# Altium PCB CT310高端控制盒基板电路V1.1.PcbDoc (part 3 of 3)
Units mil, origin at the board's own origin, x right, y up, seen from the top; angles counter-clockwise.
Board outline 8162.61 x 6196.81 mil, 2 copper layers (Top Layer, Bottom Layer), stack 65.792 mil thick; 275 components, 181 nets, 950 pads, 286 vias.
Unrouted connection lines stored in the file: 29.
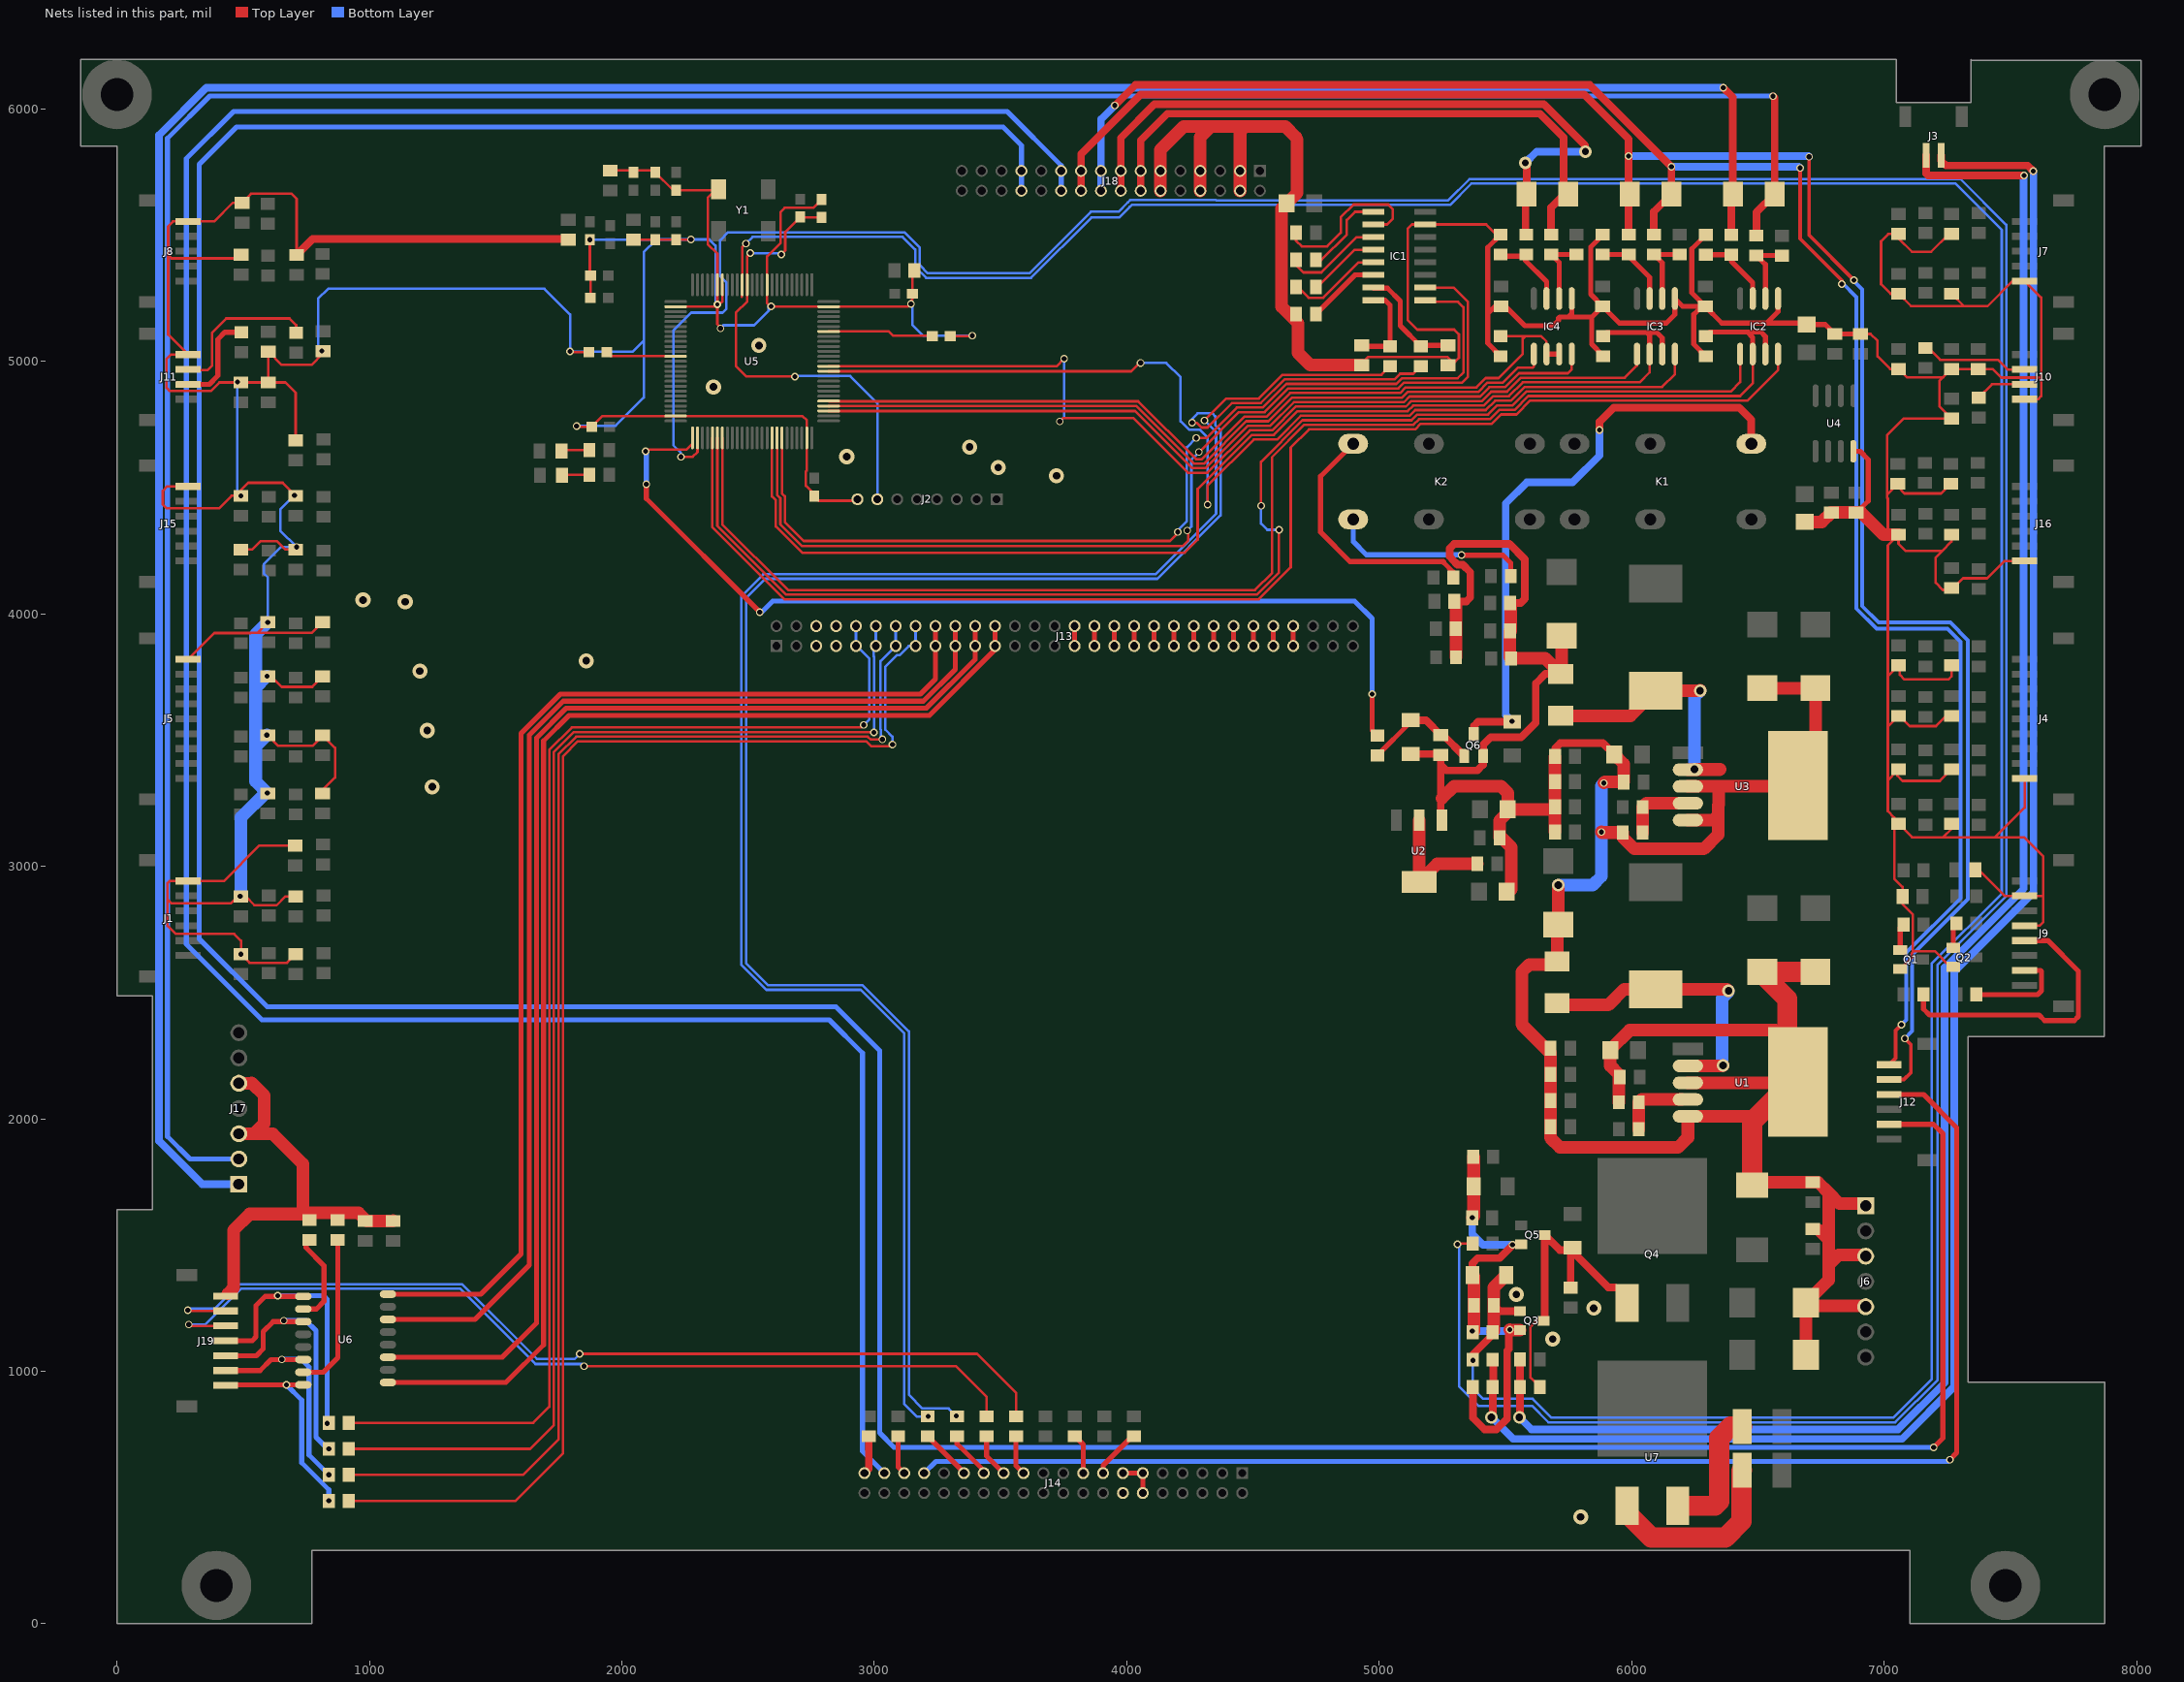
[diagram p3: the nets of this part, all layers, seen from the top]

## Via types
v1: diameter 30, hole 20, Top Layer to Bottom Layer, tented both sides, 230 vias
v2: diameter 50, hole 30, Top Layer to Bottom Layer, tented both sides, 22 vias
v3: diameter 60, hole 30, Top Layer to Bottom Layer, tented both sides, 16 vias
v4: diameter 80, hole 50, Top Layer to Bottom Layer, tented both sides, 12 vias
v5: diameter 50, hole 28, Top Layer to Bottom Layer, tented both sides, 4 vias
v6: diameter 24, hole 16, Top Layer to Bottom Layer, tented both sides, 1 vias
v7: diameter 30, hole 16, Top Layer to Bottom Layer, tented both sides, 1 vias

## Nets (pads, with @x,y where several pads share a name; then routed paths per layer and width w, separated by ;. In a path a pad name is that pad's centre, name@x,y a point inside that pad or via, vN(x,y) a via of type N, cw(c..) or ccw(c..) an arc to the next point about the centre after c; other vN are vias at no path point) (continued)
NetC87_2: C87.2 D9.2 Q6.1 R44.2 | length 464.5
  Top Layer w20: R44.2@4992.7,3439.63 5124.7,3571.63 D9.2@5124.7,3578.93
  Top Layer w30: D9.2@5124.7,3578.93 5185.15,3578.93 C87.2@5243.7,3520.37 5252.63,3520.37 Q6.1@5336.3,3436.69
NetC105_1: C105.1 IC1.3 | length 397
  Top Layer w10: C105.1@4670.28,5402.36 4670.28,5382.01 4700,5352.3 4770.49,5352.3 4910.49,5492.3 IC1.3@4976.64,5492.3
NetC105_2: C105.2 IC1.1 | length 317.6
  Top Layer w10: C105.2@4771.06,5402.36 4871.7,5503 4871.7,5560 4904,5592.3 IC1.1@4976.64,5592.3
NetC106_1: C106.1 IC1.5 | length 382
  Top Layer w10: C106.1@4670.28,5294.83 4677.49,5294.83 4720.02,5252.3 4778.03,5252.3 4918.03,5392.3 IC1.5@4976.64,5392.3
NetC106_2: C106.2 IC1.4 | length 283.2
  Top Layer w10: C106.2@4754.53,5294.83 4902,5442.3 IC1.4@4976.64,5442.3
NetC107_1: C107.1 IC1.6 | length 291.8
  Top Layer w20: C107.1@4749.02,5187.3 4904.02,5342.3 IC1.6@4976.64,5342.3
NetC108_2: C108.2 IC1.2 | length 662.1
  Top Layer w10: C108.2@4670.28,5509.89 4670.28,5478.01 4693,5455.3 4794,5455.3 4847.7,5509 4847.7,5571 4898,5621.3 5035.41,5621.3 5054,5602.7 5054,5565.3 5031,5542.3 IC1.2@4976.64,5542.3
NetC109_1: C109.1 IC1.8 R103.1 | length 351.1
  Top Layer w20: C109.1@4931,5063.6 4934.94,5059.67 R103.1@5043,5059.67 5043,5222.71 5023.41,5242.3 IC1.8@4976.64,5242.3
NetC111_1: C111.1 IC1.7 R102.1 | length 446.2
  Top Layer w20: IC1.7@4976.64,5292.3 4978.64,5290.3 5032.41,5290.3 5083,5239.7 5083,5141.66 R102.1@5165,5059.67 ; R102.1@5168.94,5063.6 C111.1@5273,5063.6
NetD3_1: D3.1 Q3.3 Q4.1 Q5.3 R12.2 R18.2 | length 1175.6
  Top Layer w10: R18.2@5636.37,937.3 5598.7,974.96 5598.7,1176 5622.5,1199.8 Q3.3@5650.25,1199.8
  Top Layer w30: Q3.3@5655.25,1204.8 Q5.3@5655.25,1539.8 5715.32,1479.73 D3.1@5758.11,1479.73 ; R12.2@5758.11,1331.73 D3.1@5758.11,1479.73 ; D3.1@5765,1489.37 5758.11,1482.48 D3.1@5758.11,1479.73 ; 5933.92,1332.73 5907.08,1332.73 5760.08,1479.73 D3.1@5758.11,1479.73
NetD7_2: D7.2 L2.2 U1.2 | length 1172.4
  Top Layer w50: D7.2@5704.77,2458.32 5712.09,2451 5907.7,2451 5969.4,2512.7 L2.2@6094.7,2512.7 6378.01,2512.7 v2(6383.7,2507) ; U1.2@6199.41,2209.63 U1.2@6222.6,2209.63 6359.08,2209.63 v2(6361.41,2211.96)
  Bottom Layer w50: v2@6358.54,2214.83 6358.54,2478.83 v2@6383.7,2504
NetD8_2: D8.2 L3.2 U3.2 | length 1112.9
  Top Layer w50: D8.2@5751.03,3596 5995.3,3596 L3.2@6094.7,3695.4 6267.11,3695.4 6269.7,3698 6270.7,3697 v2(6270.7,3695) ; U3.2@6222.6,3383.16 6348.86,3383.16 6349.7,3384 v2(6248.7,3384)
  Bottom Layer w50: v2(6248.7,3384) 6248.7,3673 v2(6270.7,3695)
NetD10_1: D10.1 K1.1 Q6.3 | length 2386.7
  Top Layer w30: Q6.3@5373.7,3523.31 5373.7,3555 5391.63,3572.93 D10.1@5525.7,3572.93 ; v1(5872.7,4728) 5872.7,4761 5928.7,4817 6425.7,4817 6473.7,4769 K1.1@6473.7,4674
  Bottom Layer w30: v1(5525.7,3575) 5500.7,3600 5500.7,4437 5584.7,4521 5765.7,4521 5872.7,4628 v1(5872.7,4728)
NetD60_2: D60.2 R100.2 | length 107.2
  Top Layer w10: D60.2@1764.31,4648.29 R100.2@1871.54,4648.29
NetD61_2: D61.2 R101.2 | length 107.3
  Top Layer w10: D61.2@1764.27,4550.69 R101.2@1871.54,4550.69
NetF1_2: F1.2 U7.1 | length 751.9
  Top Layer w80: U7.1@5982,467.35 5982,437.5 6077.7,341.8 6370.7,341.8 6434.54,405.63 6434.54,605.57 F1.2@6436.96,608
NetF2_2: F2.2 U7.3 | length 531.9
  Top Layer w80: U7.3@6182,467.35 6329.06,467.35 6346.54,484.83 6346.54,735.83 6391.71,781 F2.2@6436.96,781
NetIC2_6: IC2.6 R109.2 R117.2 | length 286.8
  Top Layer w20: IC2.6@6529.44,5249.05 6529.44,5383.94 R117.2@6493.73,5419.64 6593.74,5419.64 R109.2@6594.73,5418.65
NetIC2_7: IC2.7 R107.1 R116.2 | length 309.7
  Top Layer w20: R107.1@6293.73,5422.65 R116.2@6394.73,5422.64 6394.73,5397.02 6479.44,5312.31 IC2.7@6479.44,5249.05
NetIC3_6: IC3.6 R112.2 R119.2 | length 290.3
  Top Layer w20: IC3.6@6120.94,5249.05 6120.94,5390.44 R119.2@6087.74,5423.65 R112.2@6189.73,5423.64
NetIC3_7: IC3.7 R110.1 R118.2 | length 312.1
  Top Layer w20: R110.1@5884.73,5423.64 R118.2@5987.74,5423.65 5987.74,5416.46 6070.94,5333.25 IC3.7@6070.94,5249.05
NetIC4_6: IC4.6 R115.2 R121.2 | length 288.7
  Top Layer w20: IC4.6@5712.44,5249.05 5712.44,5391.94 R121.2@5680.74,5423.65 R115.2@5781.73,5423.64
NetIC4_7: IC4.7 R113.1 R120.2 | length 301.7
  Top Layer w20: R113.1@5480.73,5418.64 5482.73,5416.65 5579.74,5416.65 5579.74,5398.46 5662.44,5315.75 IC4.7@5662.44,5249.05
NetJ9_5: J9.5 R4.2 | length 1139.7
  Top Layer w20: R4.2@7155.37,2492.3 7155.37,2435.33 7179.7,2411 7613.7,2411 7635.7,2389 7752.7,2389 7769.11,2405.41 7769.11,2585.19 7648,2706.3 7647.47,2705.77 J9.5@7556.23,2705.77
NetJ9_7: J9.7 R5.2 | length 409.6
  Top Layer w20: R5.2@7365.37,2492.29 7608.37,2492.29 7623.44,2507.37 7623.44,2583.85 7619.64,2587.66 J9.7@7556.23,2587.66
NetJ10_2: J10.2 R6.2 | length 427.2
  Top Layer w10: R6.2@7163.98,5052.66 7175.04,5052.66 7221.09,5006.61 7450.09,5006.61 7488.49,4968.22 J10.2@7556.23,4968.22
NetJ10_3: J10.3 R8.2 | length 204
  Top Layer w10: R8.2@7374,4856.67 7426.5,4909.16 J10.3@7556.23,4909.16
NetJ11_2: J11.2 R7.2 | length 381.7
  Top Layer w20: J11.2@281.77,4909.16 365.87,4909.16 399.7,4943 399.7,5088 427.37,5115.67 R7.2@493,5115.67
NetJ11_3: J11.3 R29.2 | length 632
  Top Layer w10: J11.3@281.77,4968.22 284.99,4965 358.7,4965 376.7,4983 376.7,5114 432.7,5170 683.7,5170 709.65,5144.06 R29.2@709.65,5113.67
NetJ14_15: J14.15 R54.1 | length 200.3
  Top Layer w20: J14.15@3905.78,596.61 3905.78,627.07 4021.33,742.63 R54.1@4027.7,742.63
NetJ14_17: J14.17 R58.1 | length 159.6
  Top Layer w20: R58.1@3794.37,742.63 3827.04,709.96 J14.17@3827.04,596.61
NetJ14_23: J14.23 R38.1 | length 158.4
  Top Layer w20: R38.1@3561.04,742.63 3561.04,626.39 J14.23@3590.82,596.61
NetJ14_25: J14.25 R43.1 | length 174.1
  Top Layer w20: R43.1@3444.37,742.63 3444.37,664.32 J14.25@3512.08,596.61
NetJ14_27: J14.27 R52.1 | length 189.8
  Top Layer w20: R52.1@3327.7,742.63 3327.7,713 3433.34,607.37 J14.27@3433.34,596.61
NetJ14_29: J14.29 R57.1 | length 207.9
  Top Layer w20: R57.1@3211.04,742.63 J14.29@3347.7,605.96 ; J14.29@3347.7,603.5 J14.29@3347.7,605.96 ; J14.29@3354.6,596.61 3354.6,599.07 J14.29@3347.7,605.96
NetJ14_35: J14.35 R46.1 | length 156
  Top Layer w20: R46.1@3094.37,742.63 3094.37,620.61 J14.35@3118.38,596.61
NetJ14_39: J14.39 R51.1 | length 153
  Top Layer w30: J14.39@2960.9,596.61 2977.7,613.42 R51.1@2977.7,742.63
NetK2_4: K2.4 R21.1 | length 1017.4
  Top Layer w20: K2.4@4896.7,4674 4767.7,4545 4767.7,4323 4883.7,4207 5253,4207 5254.7,4205.3 5254.7,4203.59 5293.07,4165.22 R21.1@5293.07,4144
NetK2_5: K2.5 R22.1 | length 799.9
  Top Layer w20: v1(5325.7,4233) 5325.7,4232 5490.7,4232 5521.07,4201.63 R22.1@5521.07,4149
  Bottom Layer w20: K2.5@4896.7,4374 4896.7,4286.3 4949,4234 v1@5325.7,4234
NetL1_2: L1.2 U2.2 U2.4 | length 504.1
  Top Layer w50: U2.2@5158,3182.34 U2.4@5158,2938.25 5230.05,3010.3 L1.2@5388.13,3010.3
NetQ1_1: Q1.1 R122.1 | length 105.9
  Top Layer w20: Q1.1@7063.85,2668.7 7063.85,2756.52 R122.1@7076.63,2769.3
NetQ2_1: Q2.1 R123.1 | length 102.9
  Top Layer w20: Q2.1@7273.85,2676.7 7273.85,2761.52 R123.1@7286.63,2774.3
NetR1_1: R1.1 U6.10 | length 359.9
  Top Layer w20: U6.10@738.12,1246.5 790.2,1246.5 819.7,1276 819.7,1419 748.88,1489.83 R1.1@748.88,1512.78
NetR2_2: R2.2 R3.2 U1.4 | length 283.1
  Top Layer w50: R2.2@6027.5,1958.3 6027.5,2064.6 6039.2,2076.3 U1.4@6199.41,2076.3
NetR30_2: R30.2 R35.2 U3.4 | length 286.6
  Top Layer w50: R35.2@6043.07,3134.03 R30.2@6043.07,3235.01 6057.89,3249.83 U3.4@6222.6,3249.83
NetR37_1: R37.1 U6.15 | length 624.3
  Top Layer w20: U6.15@738.12,996.5 817.2,996.5 874.7,1054 R37.1@874.7,1517.88
NetR97_1: R97.1 U5.37 | length 279.2
  Top Layer w10: R97.1@1940.43,5036.29 1955.81,5020.91 2211.92,5020.91 U5.37@2212.85,5019.98
NetR98_2: R98.2 U5.94 | length 417.6
  Top Layer w10: U5.94@2819.15,5118.4 3057.46,5118.4 3074.57,5101.29 3228.27,5101.29 R98.2@3229.27,5100.29
NRST: C89.1 J2.7 R99.2 U5.14 | length 1863
  Top Layer w10: v1(2508.7,5429) 2496.31,5416.61 U5.14@2496.31,5303.44 2496.31,5237.61 2451.7,5193 2451.7,4981 2492.7,4940 v1(2684.7,4940) ; v1(2631.7,5424) 2646.7,5439 2646.7,5512.57 R99.2@2706,5571.86 2707.3,5570.57 C89.1@2790.71,5570.57
  Bottom Layer w10: v1(2508.7,5429) 2626.7,5429 v1(2631.7,5424) ; v1@2684.7,4942 2904.79,4942 3011.86,4834.94 J2.7@3011.86,4454
POWERCNT: R20.1 U5.52 | length 13953.6
  Top Layer w10: v1(2233.7,4622) 2280.7,4622 2299.46,4640.76 U5.52@2299.46,4697.15 ; v1@5309.7,1505.3 R20.1@5370.63,1505.3
  Bottom Layer w10: v1(2233.7,4622) 2233.7,4638 2203.7,4668 2203.7,5122 2274.7,5193 2398.7,5193 2413.7,5208 2413.7,5312.54 2388.7,5337.54 2388.7,5479 2420.7,5511 3119.25,5511 3179.7,5450.54 3179.7,5381.35 3212.05,5349 3613.65,5349 3857.65,5593 3967.34,5593 4004.17,5629.83 4004.35,5629.83 4013.51,5639 4352.97,5639 4354.18,5637.79 5272.79,5637.79 5357,5722 7302.11,5722 7483.7,5540.4 7483.7,2882.34 7211.7,2610.34 7211.7,966.34 7043.37,798 5669.7,798 5604.7,863 5392.7,863 5315.7,940 5315.7,1497 v1(5309.7,1503)
POWEROUTCNT: R44.1 U5.51 | length 3988
  Top Layer w10: v1(2093.7,4644) 2100.7,4651 2256.7,4651 2279.78,4674.08 U5.51@2279.78,4697.15
  Top Layer w20: v1(2096.7,4513) 2096.7,4457 2545.7,4008 v1(2545.7,4007) ; v1(4971.7,3682) 4971.7,3539.37 R44.1@4992.7,3518.37
  Bottom Layer w20: v1(2093.7,4644) 2096.7,4641 v1(2096.7,4513) ; v1@2549.7,4003 2597.7,4051 4901.7,4051 4971.7,3981 v1(4971.7,3682)
RJ45_RX+: J13.19 J13.20 U6.6 | length 4715
  Top Layer w20: U6.6@1073.29,1205.5 1418.2,1205.5 1633.7,1421 1633.7,3520.2 1767.51,3654 3194.51,3654 3320.81,3780.3 J13.19@3320.81,3872.87 J13.20@3320.81,3951.61
RJ45_RX-: J13.17 J13.18 U6.8 | length 4595.9
  Top Layer w20: U6.8@1073.29,1305.5 1441.2,1305.5 1600.7,1465 1600.7,3526.79 1755.91,3682 3182.91,3682 3242.07,3741.16 J13.17@3242.07,3872.87 J13.18@3242.07,3951.61
RJ45_TX+: J13.23 J13.24 U6.1 | length 5101.7
  Top Layer w20: U6.1@1073.29,955.5 1540.2,955.5 1689.7,1105 1689.7,3497 1790.7,3598 3217.7,3598 3478.29,3858.58 J13.23@3478.29,3872.87 J13.24@3478.29,3951.61
RJ45_TX-: J13.21 J13.22 U6.3 | length 4960.9
  Top Layer w20: U6.3@1073.29,1055.5 1526.2,1055.5 1661.7,1191 1661.7,3508.6 1779.11,3626 3206.11,3626 3399.55,3819.44 J13.21@3399.55,3872.87 J13.22@3399.55,3951.61
RS232_RXD1: R57.2 R103.2 | length 7028.1
  Top Layer w10: v1(4307.7,4766) 4394.7,4853 4523.23,4853 4617.09,4946.86 5008.94,4946.86 R103.2@5043,4980.93
  Bottom Layer w10: v1(3212.7,821) 3167.7,821 3118.7,870 3118.7,2338.54 2946.25,2511 2572.25,2511 2473.7,2609.54 2473.7,4070.46 2560.25,4157 4113.25,4157 4353.43,4397.18 4353.43,4720.27 v1(4307.7,4766)
RS232_RXD2: J19.5 R43.2 | length 3621.4
  Top Layer w10: v1(284.7,1185) 289.65,1180.06 J19.5@430.48,1180.06 ; v1(1849.7,1020) 3323.7,1020 3444.37,899.33 R43.2@3444.37,821.37
  Bottom Layer w10: v1(284.7,1185) 349.16,1185 491.16,1327 1359.7,1327 1657.7,1029 1840.7,1029 v1(1849.7,1020)
RS232_TXD1: R52.2 R102.2 | length 7417.4
  Top Layer w10: v1(4258.7,4757) 4277.11,4757 4296.11,4738 4319.3,4738 4416.3,4835 4530.69,4835 4624.55,4928.86 5060.5,4928.86 5082.64,4951 5135.07,4951 R102.2@5165,4980.93
  Bottom Layer w10: v1(3324.7,823) 3323.7,823 3293.7,853 3190.7,853 3136.7,907 3136.7,2346 2953.7,2529 2579.7,2529 2491.7,2617 2491.7,4063 2567.7,4139 4120.7,4139 4371.43,4389.73 4371.43,4727.73 4350.7,4748.46 4350.7,4783 4339.7,4794 4280.7,4794 4258.7,4772 v1(4258.7,4757)
RS232_TXD2: J19.6 R38.2 | length 3762.1
  Top Layer w10: v1(280.7,1242) 283.59,1239.11 J19.6@430.48,1239.11 ; v1(1832.7,1069) 3406.7,1069 3561.04,914.67 R38.2@3561.04,821.37
  Bottom Layer w10: v1(280.7,1242) 286.7,1248 386.7,1248 483.7,1345 1367.16,1345 1663.16,1049 1812.7,1049 v1(1832.7,1069)
RS485_A2: D62.2 J17.2 R117.1 | length 11287.1
  Top Layer w30: R117.1@6493.73,5498.38 6493.73,5590.68 D62.2@6566.07,5663.02 6566.07,6043.63 v1(6559.7,6050)
  Bottom Layer w20: J17.2@482.7,1841 288.7,1841 199.7,1930 199.7,5883 367.7,6051 6558.7,6051 v1(6559.7,6050)
RS485_A3: D63.2 J12.1 J18.17 J18.18 R119.1 | length 7640.8
  Top Layer w15: v1(6666.7,5766) 6666.7,5486 6832,5320.7 v1(6832,5306) ; J12.1@7019.93,2214.64 7045.7,2240.41 7045.7,2350 v1(7068.7,2373)
  Top Layer w30: v1(3952.7,6014) 4033.7,6095 5833.7,6095 v1(6157.57,5771.13) D63.2@6157.57,5663.02 6087.74,5593.18 R119.1@6087.74,5502.39
  Bottom Layer w15: v1@6835.35,5309.35 6890.2,5254.5 6890.2,4020.97 6970.18,3941 7250.7,3941 7302.7,3889 7302.7,2872.87 7088.2,2658.37 7088.2,2392.5 v1(7068.7,2373)
  Bottom Layer w30: J18.18@3897.48,5675.79 J18.17@3897.48,5754.53 3897.48,5958.78 v1(3952.7,6014) ; v1(6157.57,5771.13) 6661.57,5771.13 v1(6666.7,5766)
RS485_A4: D64.2 J18.13 J18.14 R121.1 | length 2387
  Top Layer w30: J18.14@4054.96,5675.79 J18.13@4054.96,5754.53 4054.96,5875.26 4160.7,5981 5635.96,5981 5730.06,5886.91 5730.06,5682.03 D64.2@5749.07,5663.02 5733.73,5663.02 5680.74,5610.02 R121.1@5680.74,5502.39
RS485_B2: D62.1 J17.1 R116.1 | length 11237.5
  Top Layer w30: v1(6362.7,6084) 6400.72,6045.99 D62.1@6400.72,5663.02 ; R116.1@6394.73,5501.38 D62.1@6394.73,5657.03
  Bottom Layer w30: J17.1@482.7,1741 337.7,1741 166.7,1912 166.7,5896.67 354.04,6084 v1(6362.7,6084)
RS485_B3: D63.1 J12.2 J18.19 J18.20 R118.1 | length 7846.5
  Top Layer w15: v1(6702.7,5810) 6702.7,5500 v1@6880.35,5322.35 ; J12.2@7019.93,2155.58 7078.29,2155.58 7105.7,2183 7105.7,2294 v1(7081.7,2318)
  Top Layer w30: J18.20@3818.74,5675.79 J18.19@3818.74,5754.53 3818.74,5821.04 4054.7,6057 5811.7,6057 5987.74,5880.97 v1(5987.74,5813) 5987.74,5667.5 D63.1@5992.22,5663.02 5987.74,5658.53 R118.1@5987.74,5502.39
  Bottom Layer w15: v1@6877.85,5319.85 6913.2,5284.5 6913.2,4030.5 6977.7,3966 7261.7,3966 7331.7,3896 7331.7,2869.34 7111.2,2648.84 7111.2,2347.5 v1(7081.7,2318)
  Bottom Layer w30: v1(5987.74,5813) 6699.7,5813 v1(6702.7,5810)
  other v1: 6880,5322
RS485_B4: D64.1 J18.15 J18.16 R120.1 | length 2755.4
  Top Layer w30: J18.16@3976.22,5675.79 J18.15@3976.22,5754.53 3976.22,5885.52 4109.7,6019 5651.7,6019 5814.72,5855.99 v5@5814.72,5822 ; D64.1@5565.06,5663.02 5579.74,5648.34 R120.1@5579.74,5495.39 ; D64.1@5583.72,5663.02 v5@5583.72,5783
  Bottom Layer w30: v5(5578.7,5786) 5623.7,5831 v5(5816.72,5831)
RX+: J19.3 R64.1 U6.11 | length 1039.5
  Top Layer w20: J19.3@430.48,1061.94 551.65,1061.94 578.7,1089 578.7,1157 618.2,1196.5 U6.11@738.12,1196.5
  Bottom Layer w20: v1(660.7,1201) 748.7,1201 788.7,1161 788.7,739 834.7,693 v1(839.33,693)
RX-: J19.4 R68.1 U6.9 | length 1153.2
  Top Layer w20: J19.4@430.48,1121 535.7,1121 550.7,1136 550.7,1260 587.2,1296.5 U6.9@738.12,1296.5 ; v1(832.7,794) 834.7,796 R68.1@839.33,796
  Bottom Layer w20: v1(636.7,1299) 818.7,1299 832.7,1285 v1(832.7,794)
SGND: C1.2 C2.1 C3.1 C4.2 C5.1 C6.2 C7.2 C8.2 C9.1 C10.1 C11.1 C12.1 C13.1 C14.1 C15.2 C16.2 C17.2 C18.2 C19.2 C20.2 C21.1 C22.1 C23.2 C24.2 C25.2 C26.2 C27.2 C28.2 C29.2 C30.2 C31.2 C32.2 C33.2 C34.2 C35.2 C36.2 C37.2 C38.2 C39.2 C40.2 C41.2 C42.2 C43.2 C44.2 C45.2 C46.2 C47.2 C48.2 C49.2 C50.2 C51.2 C52.2 C53.2 C54.2 C55.2 C56.2 C57.2 C58.2 C59.2 C60.2 C61.2 C62.2 C63.2 C64.2 C65.2 C66.2 C67.2 C68.1 C69.2 C70.1 C71.2 C72.2 C73.1 C74.1 C75.1 C76.2 C77.2 C78.2 C79.1 C80.1 C81.1 C82.1 C83.1 C84.1 C85.2 C86.2 C87.1 C88.1 C89.2 C90.2 C91.2 C92.1 C93.1 C94.2 C95.1 C96.2 C97.2 C98.2 C99.1 C100.2 C101.1 C102.2 C103.1 C104.2 C107.2 C109.2 C111.2 C112.1 C113.1 C114.1 C115.1 D4.1 D5.1 D6.1 D7.1 D8.1 D9.1 IC1.15 IC2.5 IC3.5 IC4.5 J1.6 J2.8 J4.9 J5.9 J6.1 J6.3 J6.5 J7.5 J8.5 J9.2 J9.4 J10.4 J11.4 J12.3 J12.5 J13.5 J13.6 J13.7 J13.8 J14.11 J14.12 J14.13 J14.14 J14.33 J14.37 J15.6 J16.6 J17.3 J17.5 J18.3 J18.4 J18.7 J18.8 J18.11 J18.12 J18.21 J18.22 J18.25 J18.26 J19.7 Q1.2 Q2.2 Q3.2 Q5.2 Q6.2 R1.2 R3.1 R11.1 R19.1 R27.1 R28.1 R35.1 R36.1 R37.2 R97.2 R98.1 R104.2 R105.2 R106.2 R107.2 R110.2 R113.2 U1.0 U1.3 U1.5 U2.1 U3.0 U3.3 U3.5 U4.4 U5.10 U5.19 U5.20 U5.27 U5.49 U5.74 U5.99 Y1.2 | length 87607
  Top Layer w10: J5.9@281.77,3820.52 385.26,3924 527.7,3924 528.25,3924.55 555.23,3924.55 ; J15.6@281.77,4504.93 199.64,4504.93 181.7,4487 181.7,4433 196.7,4418 404.7,4418 454.31,4467.6 v1(491.03,4467.6) ; C67.2@477.7,4916.67 405.9,4916.67 371.62,4882.38 209.32,4882.38 196.49,4895.22 196.49,5009.78 213.98,5027.27 J11.4@281.77,5027.27 202.7,5106.34 202.7,5421 ; C30.2@487.7,2880.92 478.62,2880.92 450.7,2853 216.7,2853 200.7,2869 ; C30.2@491.03,2880.92 509.79,2880.92 544.7,2846 632.04,2846 666.95,2880.92 C29.2@707.68,2880.92 ; C52.2@491.03,4254.6 535.69,4254.6 568.38,4287.29 634.27,4287.29 666.95,4254.6 C49.2@707.68,4254.6 ; C58.2@491.03,4490.33 519.7,4519 656.28,4519 C55.2@704.49,4470.79 ; C67.2@491.03,4916.67 C69.2@599.35,4916.67 ; C59.2@492.06,5422.95 477.11,5408 215.7,5408 202.7,5421 ; C46.2@597.35,3518.6 638.96,3477 775.7,3477 814,3515.3 C42.2@814,3518.6 863.7,3468.9 863.7,3352 814,3302.3 C34.2@814,3288.6 ; v1(597.35,3966.67) 555.23,3924.55 ; C39.2@612.04,3751.67 652.7,3711 773.33,3711 C35.2@814,3751.67 ; C31.2@705.68,3082.67 564.37,3082.67 423.69,2941.99 J1.6@281.77,2941.99 208.69,2941.99 200.7,2934 200.7,2869 ; C27.2@707.68,2652.42 673.26,2618 524.7,2618 491.03,2651.67 v1(491.03,2652.42) 491.03,2705.67 464.16,2732.55 232.67,2732.55 200.7,2764.51 200.7,2869 ; C61.2@707.68,4687.1 707.68,4876.03 667.04,4916.67 C69.2@599.35,4916.67 ; C56.2@711.61,5421.79 711.61,5644.09 691.7,5664 531.02,5664 C62.2@494.97,5627.95 458.65,5627.95 385.11,5554.41 J8.5@281.77,5554.41 222.11,5554.41 202.7,5535 202.7,5421 ; C43.2@814,3966.67 771.88,3924.55 555.23,3924.55 ; C26.2@816,5031.3 770.7,4986 652.28,4986 C24.2@599.35,5038.93 C69.2@599.35,4916.67 ; v1(1794.7,5039) 1794.7,5037 1794,5036.29 R97.2@1869.57,5036.29 ; v1(1820.7,4744) 1823.41,4741.29 C102.2@1880.47,4741.29 1922.94,4783.76 U5.49@2212.85,4783.76 2714.77,4783.76 2732.53,4766 U5.74@2732.53,4697.15 2732.53,4567.99 2729.02,4564.47 2729.02,4506.88 2761.71,4474.2 C100.2@2761.71,4466.57 2780.27,4448 2927.11,4448 J2.8@2933.11,4454 ; v1(1873,5481.92) 1873,5342.86 C97.2@1875.57,5340.3 1875.57,5251.39 C104.2@1875.47,5251.29 ; C90.2@1954,5756.6 2124.13,5756.6 C94.2@2132,5748.73 2202.87,5677.86 C93.1@2215,5677.86 2379.46,5677.86 Y1.2@2382.57,5680.97 2373.68,5680.97 2340.05,5647.34 2340.05,5464.66 2378.2,5426.5 U5.20@2378.2,5303.44 v7(2378.2,5225.3) ; C99.1@2046.06,5481.92 C103.1@2215,5481.92 ; U5.27@2212.85,5216.83 v7@2377.54,5216.83 ; C103.1@2215,5481.92 2272.63,5481.92 v1(2273.7,5483) ; v1(2390.7,5131) 2390.7,5135 2378.2,5147.5 2378.2,5217.5 2397.89,5237.19 U5.19@2397.89,5303.44 ; v1@2588.22,5216.83 2575.05,5230 U5.10@2575.05,5303.44 2575.05,5416.35 2628.7,5470 2628.7,5591.79 2644.99,5608.07 2757.35,5608.07 C89.2@2790.71,5641.43 ; v1@2590.7,5216.83 U5.99@2819.15,5216.83 3133.54,5216.83 v1(3144.7,5228) ; v1@3138.7,5234 3151.34,5246.63 ; C98.2@3151.34,5268.29 3151.34,5355 C96.2@3159.21,5355 ; R98.1@3300.14,5100.29 3387,5100.29 3388.7,5102 v1(3387.7,5102) ; C109.2@4931,4984.86 4931,4992.3 4956.25,5017.55 5269.75,5017.55 C111.2@5289,4998.3 ; IC1.15@5181.36,5542.3 5130,5542.3 5112.7,5525 5112.7,5164 5150.7,5126 5296.7,5126 5315.53,5107.18 5315.53,5013.82 5300,4998.3 C111.2@5289,4998.3 ; 5225.7,5542.3 5423.41,5542.3 5463.32,5502.39 R113.2@5480.73,5502.39 ; C111.2@5273,4984.86 5275.57,4984.86 C111.2@5289,4998.3 ; C83.1@6906.41,5108.45 6946.26,5108.45 6973.7,5081 6973.7,5020 7023.72,4969.99 C23.2@7057,4969.99 7089.69,4937.3 7234.34,4937.3 C78.2@7267,4969.99 ; 7014.47,4313.49 7014.47,4457 7011.47,4460 7011.47,4708.03 7077.43,4773.99 C25.2@7267.02,4773.99 7219,4822.01 7219,4921.97 C78.2@7267,4969.99 ; 7014.47,4475.83 C48.2@7054,4515.36 7054,4503.7 7080.7,4477 7225.66,4477 C51.2@7264.02,4515.36 ; C41.2@7057,3168.86 7110.57,3115.3 7234,3115.3 ; C33.2@7057,3384.86 7057,3383.76 C33.2@7052,3378.76 ; C32.2@7057,3795.86 7014.47,3753.33 ; C32.2@7062,3792.3 7062,3758.3 7080,3740.3 7254,3740.3 7267.02,3753.32 C36.2@7267.02,3795.86 ; Q1.2@7063.85,2593.89 7109.91,2639.95 7109.91,2656.36 7113.25,2659.71 ; C66.2@7267,5267.99 7315.99,5219 ; C71.2@7267,5504.99 7256.69,5504.99 7185.7,5434 7110.7,5434 7057,5487.7 C50.2@7057,5504.99 7016.69,5504.99 6987.7,5476 6987.7,5306 7025.72,5267.99 C64.2@7057,5267.99 7105.99,5219 7315.99,5219 ; C45.2@7267.02,3168.86 7267.02,3148.32 7234,3115.3 ; C37.2@7267.02,3384.86 7220.46,3338.3 7073,3338.3 7052,3359.3 C33.2@7052,3378.76 ; C44.2@7267.02,3595.86 7245.57,3595.86 7205.01,3555.3 7100.99,3555.3 7060.43,3595.86 C40.2@7057,3595.86 7014.47,3553.33 ; C57.2@7267.02,4313.49 7267.02,4286.32 7230,4249.3 ; Q2.2@7273.85,2601.89 7262.4,2601.89 7200.32,2663.98 7117.52,2663.98 7113.25,2659.71 ; C65.2@7361.43,2986.3 7373,2986.3 7476.36,2882.93 J9.2@7556.23,2882.93 7630.36,2882.93 ; J9.4@7556.23,2764.82 7614.7,2764.82 7630.36,2780.48 7630.36,2882.93 ; J4.9@7556.23,3348.07 7556.23,3232.52 7439,3115.3 ; J16.6@7556.23,4209.66 7476.61,4209.66 7408,4141.04 7313.07,4141.04 7267.02,4094.99 7232.31,4094.99 7204,4123.3 7204,4223.3 7230,4249.3 ; J10.4@7556.23,4850.11 7609.81,4850.11 7621.7,4862 7621.7,4925.06 ; 7014.47,3341.23 7014.47,3553.33 ; 7014.47,3341.23 7014.47,3218.6 7040.01,3193.06 7040.01,2951.35 7072.69,2918.67 C63.2@7072.69,2880.3 7072.69,2850.42 7113.25,2809.86 7113.25,2659.71 ; 7014.47,3341.23 C33.2@7052,3378.76 ; 7014.47,3553.33 7014.47,3753.33 ; 7014.47,3753.33 7014.47,4270.96 C54.2@7057,4313.49 7057,4277.29 7085,4249.3 7230,4249.3 ; 7234,3115.3 7439,3115.3 ; C78.2@7267,4969.99 7429.72,4969.99 7463.76,4935.94 7610.83,4935.94 7621.7,4925.06 ; 7315.99,5219 7409.7,5219 7508.89,5318.18 J7.5@7556.23,5318.18 7621.7,5252.71 7621.7,4925.06 ; 7439,3115.3 7554.41,3115.3 7630.36,3039.34 7630.36,2882.93
  Top Layer w20: J14.13@3984.52,596.61 J14.11@4063.26,596.61 J14.12@4063.26,517.87 ; R106.2@5480.73,5020.65 5429.73,5071.64 5429.73,5188.02 ; R113.2@5480.73,5502.39 5429.73,5451.39 5429.73,5188.02 ; C115.1@5482.7,5218.21 5459.93,5218.21 5429.73,5188.02 ; C115.1@5482.7,5221.65 5496.1,5221.65 5576.75,5141 5687.25,5141 5709.72,5163.47 5709.72,5171.47 5714.26,5176.02 5748.73,5176.02 ; IC4.5@5762.44,5249.05 5762.44,5189.72 5748.73,5176.02 ; R110.2@5884.73,5502.39 5884.73,5500.28 5837.42,5452.97 5837.42,5265.87 5884.95,5218.34 C114.1@5884.95,5218.21 ; R105.2@5886.92,5020.65 5886.92,5022.75 5841.36,5068.31 5841.36,5174.62 5842.75,5176.02 ; R104.2@6293.1,5020.65 6245.73,5068.01 6245.73,5186.02 C113.1@6277.93,5218.21 ; R107.2@6293.73,5501.39 6237.73,5445.39 6237.73,5271.6 C113.1@6291.13,5218.21 ; IC2.5@6579.44,5249.05 6579.44,5196.72 6534.72,5152 ; U4.4@6878.12,4644.05 6904.65,4644.05 6936.94,4611.77 6936.94,4447.01 C81.1@6891.51,4401.58 ; C83.1@6906.41,5108.45 C82.1@6804.41,5108.45 6767.01,5145.85 C84.1@6693.7,5145.85 6687.55,5152 6534.72,5152 ; J12.5@7019.93,1978.42 7195.29,1978.42 7232.82,1940.89 7232.82,736.11 v1(7195.7,699) ; J12.3@7019.93,2096.53 7156.18,2096.53 7287.7,1965 7287.7,677 v1(7260.7,650) ; 5748.73,5176.02 5842.75,5176.02 ; 5842.75,5176.02 C114.1@5884.95,5218.21 ; C114.1@5884.95,5218.21 5951.16,5152 6137.72,5152 6170.94,5185.22 IC3.5@6170.94,5249.05 6201.79,5218.21 C113.1@6277.93,5218.21 ; C113.1@6277.93,5218.21 C113.1@6291.13,5218.21 ; C113.1@6291.13,5218.21 6357.34,5152 6534.72,5152
  Top Layer w30: C56.2@711.61,5421.79 774.82,5485 1783.92,5485 C95.1@1787,5481.92 ; D9.1@5124.7,3445.07 5240.26,3445.07 C87.1@5243.7,3441.63 5243.7,3402 ; U2.1@5248.55,3182.34 5243.7,3187.19 5243.7,3402 ; C17.2@5297.78,4049.3 5345,4049.3 5360.7,4065 5360.7,4165 5330.7,4195 5309.96,4195 5287.7,4217.26 5287.7,4218.96 5278.7,4227.96 5278.7,4259 5296.7,4277 5515.7,4277 5576.7,4216 5576.7,4060 5560,4043.3 5521.72,4043.3 C18.2@5517.78,4043.3 ; D5.1@5369.07,1381.3 5369.07,1427.37 5390,1448.3 5477,1448.3 5528,1499.3 v1(5528,1501.3) ; R19.1@5370.63,937.3 5370.63,816.07 5416.7,770 5464.59,770 5506.7,812.12 5506.7,1081.78 5512.7,1087.78 5512.7,1161 v1(5517,1165.3) ; C73.1@5696.33,3435 5696.33,3467 5717.33,3488 5885.74,3488 C68.1@5930.87,3442.87 ; D8.1@5718.7,3762.68 5658.38,3762.68 5619.7,3724 5619.7,3569 5561.7,3511 5441.7,3511 5411.11,3480.4 Q6.2@5411.11,3436.69 5411.11,3402.4 5388.7,3380 5265.7,3380 5243.7,3402
  Top Layer w50: J19.7@439.31,1307 461.7,1329.39 461.7,1559 525.72,1623.02 748.88,1623.02 ; J17.3@482.7,1941 541.7,1941 ; J17.5@482.7,2141 532.7,2141 533.7,2142 582.7,2093 582.7,1982 541.7,1941 ; C85.2@1093.7,1597.37 1091.7,1595.37 989.7,1595.37 956.96,1628.12 753.98,1628.12 748.88,1623.02 ; J18.12@4133.7,5675.79 J18.11@4133.7,5754.53 4133.7,5839 4225.37,5930.67 4334,5930.67 ; J18.8@4291.18,5675.79 J18.7@4291.18,5754.53 4291.18,5887.85 4334,5930.67 ; J18.4@4448.66,5675.79 J18.3@4448.66,5754.53 4448.66,5910.33 4469,5930.67 ; 4670.07,5887.9 4627.31,5930.67 4469,5930.67 ; 4674.7,5879 4674.7,5667.12 C112.1@4632.88,5625.3 4612.7,5605.12 4612.7,5217 4678.7,5151 4678.7,5033 4726.84,4984.86 C109.2@4931,4984.86 ; 5248.55,3269.85 5296.7,3318 5481.7,3318 5508.82,3290.88 C6.2@5508.82,3226 5686.67,3226 C75.1@5696.33,3235.67 ; R27.1@5303.78,3828.3 C17.2@5303.78,4043.3 ; v1(5368.63,1608.3) 5374.07,1613.74 D6.1@5374.07,1732.3 5374.07,1848.5 R36.1@5372.57,1850 ; D5.1@5369.07,1381.3 5374.63,1375.74 R11.1@5374.63,1160.3 ; C6.2@5514.12,3219.3 5476.72,3181.89 C9.1@5476.72,3113.3 5485,3113.3 5523.5,3074.8 C4.2@5523.5,2908.67 ; v1(5517,1165.3) 5519.5,1162.8 Q3.2@5557.75,1162.8 ; C16.2@5517.78,3932.31 5517.78,3827.22 R28.1@5521.72,3823.28 5658.1,3823.28 D8.1@5718.7,3762.68 ; C16.2@5521.72,3932.31 C18.2@5521.72,4043.3 ; C88.1@5696.33,3136 C75.1@5696.33,3235.67 ; C73.1@5696.33,3435 C74.1@5696.33,3335.33 C75.1@5696.33,3235.67 ; v2(5708.7,2926) C7.2@5708.7,2769.02 5704.77,2765.08 D7.1@5704.77,2623.68 5692.59,2611.5 5594.2,2611.5 5564.56,2581.85 5564.56,2374.15 5678.04,2260.67 5678.04,2176.67 C10.1@5678.04,2072.96 C11.1@5678.04,1969.3 5678.04,1924.67 5715.7,1887 6183.7,1887 6222.6,1925.9 U1.5@6222.6,2009.63 6497.74,2009.63 ; D8.1@5718.7,3793.68 5722.7,3797.68 C72.2@5722.7,3914.02 ; v1(5879.7,3136) 5881.67,3134.03 R35.1@5964.33,3134.03 5964.33,3114.92 6010.26,3069 6285.7,3069 6342.7,3126 6342.7,3204 ; v1(5889.7,3330) 5893.73,3334.02 C70.1@5968.27,3334.02 5968.27,3405.47 C68.1@5930.87,3442.87 ; R3.1@5948.76,2064.6 5948.76,2176.8 5915.29,2210.27 C2.1@5915.29,2271.29 5915.29,2274.66 5991.63,2351 6569.41,2351 6616.41,2304 U1.0@6616.41,2164.3 ; U1.3@6222.6,2142.96 U1.0@6631.08,2142.96 ; U3.5@6222.6,3183.16 6321.86,3183.16 6342.7,3204 ; U3.3@6222.6,3316.49 6331.21,3316.49 ; D4.1@6477,1737.25 6488.42,1748.67 C22.1@6717,1748.67 6738.08,1748.67 6779.53,1707.22 ; C8.2@6517.7,3706.02 C53.2@6727.7,3706.02 6727.7,3389.93 U3.0@6657.6,3319.83 6654.27,3316.49 6331.21,3316.49 ; U1.0@6634.41,2146.3 U1.0@6667.41,2113.3 ; C79.1@6685.41,4364.18 6753.01,4364.18 C80.1@6790.41,4401.58 C81.1@6889.41,4401.58 6891.51,4401.58 6909.13,4401.58 6997.22,4313.49 7014.47,4313.49 C54.2@7057,4313.49 ; C20.2@6689.98,1065 C19.2@6689.98,1271.3 6779.53,1360.84 6779.53,1421 ; C19.2@6701.28,1260 J6.5@6919.7,1260 ; C21.1@6742.45,1559.3 6779.53,1522.22 ; J6.3@6919.7,1460 6818.53,1460 6779.53,1421 ; J6.1@6924.7,1664 6822.74,1664 6779.53,1707.22 ; 541.7,1941 616.7,1941 736.7,1821 736.7,1635.19 748.88,1623.02 ; 4334,5930.67 4469,5930.67 ; 6331.21,3316.49 6343.7,3304 6343.7,3244 6342.7,3243 6342.7,3204 ; 6779.53,1421 6779.53,1522.22 ; 6779.53,1522.22 6779.53,1707.22
  Top Layer w80: D4.1@6477,1737.25 6477,1988.89 6497.74,2009.63 6631.08,2142.96 6634.41,2146.3 U1.0@6657.6,2146.3 ; U1.0@6616.41,2304 6616.41,2474.31 6508.7,2582.02 C86.2@6727.7,2582.02
  Bottom Layer w10: v1(477.7,4919) 475.7,4917 475.7,4482.93 v1(491.03,4467.6) ; v1(597.35,3966.67) 597.35,4144.75 581.78,4160.33 581.78,4196.07 650.7,4265 v1(711.7,4265) 646.7,4330 646.7,4413 v1(702.7,4469) ; v1(811.7,5041) 796.7,5056 796.7,5248 836.7,5288 1692.7,5288 1794.7,5186 v1(1794.7,5039) 2043.7,5039 2086.7,5082 ; v1(1820.7,4744) 1821.7,4745 1974.7,4745 2086.7,4857 2086.7,5082 ; v1(1873,5481.92) 2135.63,5481.92 ; v7(2378.2,5225.3) 2370.7,5232.8 2370.7,5458 2345.7,5483 v1(2273.7,5483) 2136.7,5483 2135.63,5481.92 ; v1(2390.7,5131) 2402.7,5143 2523.7,5143 2581.7,5201 2581.7,5218 v1(2590.7,5218) ; v1(3144.7,5228) 3151.34,5221.37 3151.34,5143.37 3192.7,5102 v1(3387.7,5102) ; 2086.7,5082 2086.7,5433 2135.63,5481.92
  Bottom Layer w20: J14.37@3039.64,596.61 2953.2,683.04 2953.2,2260.5 2821.24,2392.46 574.24,2392.46 274.7,2692 274.7,5803 461.7,5990 3526,5990 3740,5776 J18.21@3740,5754.53 J18.22@3740,5675.79 ; J14.33@3197.12,596.61 3243.51,643 7253.7,643 v1(7260.7,650) ; J18.26@3582.52,5675.79 J18.25@3582.52,5754.53 3582.52,5855.48 3510,5928 473.7,5928 325.7,5780 325.7,2713.12 595.36,2443.46 2847.24,2443.46 3020.7,2270 3020.7,756 3077.7,699 v1(7195.7,699)
  Bottom Layer w30: v1(5368,1159.3) v1@5511,1159.3 ; v1(5368.63,1608.3) 5368.63,1543.07 5410.41,1501.3 v1(5528,1501.3)
  Bottom Layer w50: v1@491.03,2882 491.03,3193.67 v1@587.37,3290 ; v1(593.7,3520) 549.35,3475.65 ; v1(594.7,3753) 549.35,3707.65 ; v1(595.7,3290) 549.35,3336.35 549.35,3475.65 ; v1(597.35,3966.67) 549.35,3918.67 549.35,3707.65 ; v2(5708.7,2926) 5845.7,2926 5879.7,2960 v1(5879.7,3136) 5879.7,3320 v1(5889.7,3330) ; 549.35,3475.65 549.35,3707.65
  other v1: 487.7,2882
  other v3: 5797.7,423 5686.7,1128 5849.7,1250 5542.7,1304 1248.7,3315 1228.7,3538 1199.7,3773 1858.7,3814 1141.7,4048 974.7,4055 3721.7,4547 3490.7,4580 2890.7,4623 3377.7,4661 2362.7,4899 2542.7,5063
SW+: J3.1 R9.1 R18.1 | length 7363.9
  Top Layer w30: v2@5557.63,837.07 R18.1@5557.63,937.3 R9.1@5557.63,1047.3 ; J3.1@7166.18,5816.23 7166.18,5744.53 7173.7,5737 v1@7552.7,5737
  Bottom Layer w30: v2(5554.7,818) 5602.7,770 7054.96,770 7239.7,954.74 7239.7,2598.74 7552.7,2911.74 v1@7552.7,5736
  other v1: 7553.7,5736
SW-: J3.2 R10.1 R19.2 | length 7534.5
  Top Layer w30: v2(5444.7,818) 5449.37,822.67 R19.2@5449.37,937.3 ; R19.2@5451.37,937.3 R10.1@5451.37,1047.3 ; J3.2@7225.23,5816.23 7225.23,5795.47 7244.7,5776 7568.7,5776 v1(7590.7,5754)
  Bottom Layer w30: v2(5444.7,818) 5530.7,732 7070.7,732 7277.7,939 7277.7,2583 7591.7,2897 7591.7,5753 v1(7590.7,5754)
SWADC: C5.2 D5.2 Q3.1 R10.2 R11.2 U5.15 | length 12749.1
  Top Layer w10: 2475.69,5256.43 U5.15@2475.69,5302.51 ; U5.15@2476.63,5303.44 2476.63,5451.93 v1(2491.7,5467)
  Top Layer w30: R10.2@5372.63,1047.3 5372.63,1067.93 5449.37,1144.67 R11.2@5449.37,1156.3 ; C5.2@5453.37,1261.3 5476.87,1237.8 Q3.1@5557.75,1237.8
  Top Layer w50: R11.2@5449.37,1156.3 5453.37,1160.3 C5.2@5453.37,1261.3 5453.37,1331.74 D5.2@5502.93,1381.3
  Bottom Layer w10: v1(2491.7,5467) 2517.7,5493 3111.79,5493 3161.7,5443.09 3161.7,5373.89 3204.6,5331 3621.11,5331 3860.11,5570 3969.79,5570 4011.62,5611.83 4011.8,5611.83 4020.97,5621 4345.51,5621 4346.72,5619.79 5280.24,5619.79 5364.46,5704 7283,5704 7465.7,5521.3 7465.7,2892 7188.17,2614.46 7188.17,968.26 7035.91,816 5682.7,816 5607.7,891 5411.7,891 5370.7,932 v1(5370.7,1043)
TX+: J19.1 R62.1 U6.16 | length 837.2
  Top Layer w20: J19.1@430.48,943.83 433.14,946.5 U6.16@738.12,946.5
  Bottom Layer w20: v1(671.7,946) 731.7,886 731.7,638 839.33,530.37 v1(839.33,487)
TX-: J19.2 R63.1 U6.14 | length 905.7
  Top Layer w20: J19.2@430.48,1002.89 566.59,1002.89 610.2,1046.5 U6.14@738.12,1046.5
  Bottom Layer w20: v1(652.7,1047) 730.7,1047 760.7,1017 760.7,668.63 v1(839.33,590)
UART1_R: IC1.9 U5.69 | length 3933.9
  Top Layer w10: U5.69@2634.11,4697.15 2634.11,4477.15 2645.7,4465.56 2645.7,4363 2719.7,4289 4170.7,4289 4201.7,4320 v1(4201.7,4324) ; v1(4274.7,4697) 4316.25,4697 4436.25,4817 4538.14,4817 4632,4910.86 5067.96,4910.86 5090.1,4933 5310.7,4933 5333.53,4955.82 5333.53,5214.18 5311.7,5236 5187.66,5236 IC1.9@5181.36,5242.3
  Bottom Layer w10: v1(4201.7,4324) 4201.7,4331.6 4237.7,4367.6 4237.7,4660 v1(4274.7,4697)
UART1_T: IC1.10 U5.68 | length 4059.4
  Top Layer w10: U5.68@2614.42,4697.15 2614.42,4471.38 2627.7,4458.1 2627.7,4354 2712.7,4269 4222.7,4269 4243.7,4290 4243.7,4326 v1(4239.7,4330) ; v1(4285.7,4641) 4443.7,4799 4545.6,4799 4639.46,4892.86 5075.41,4892.86 5097.55,4915 5327.7,4915 5351.53,4938.82 5351.53,5234.72 5293.95,5292.3 IC1.10@5181.36,5292.3
  Bottom Layer w10: v1(4239.7,4330) 4255.7,4346 4255.7,4611 v1(4285.7,4641)
UART2_E: IC2.2 IC2.3 R104.1 U5.57 | length 5672.9
  Top Layer w10: U5.57@2397.89,4697.15 2397.89,4354.71 2658.6,4094 4507.7,4094 4575.7,4162 4575.7,4320.4 4574.7,4321.4 4574.7,4620 4703.57,4748.86 5135.06,4748.86 5157.2,4771 5438.25,4771 5475.25,4808 5535.65,4808 5590.65,4863 6429.44,4863 6479.44,4913 IC2.2@6479.44,5029.05
  Top Layer w20: R104.1@6293.1,5099.39 6309.73,5116.02 6458.73,5116.02 ; IC2.2@6479.44,5029.05 6479.44,5095.31 6458.73,5116.02 ; IC2.3@6529.44,5029.05 6529.44,5099.31 6512.73,5116.02 6458.73,5116.02
UART2_R: IC2.1 U5.56 | length 5356.8
  Top Layer w10: U5.56@2378.2,4697.15 2378.2,4348.94 2651.15,4076 4515.16,4076 4602.7,4163.54 v1(4602.7,4333) ; v1(4531.7,4428) 4531.7,4602.46 4696.11,4766.86 5127.6,4766.86 5149.74,4789 5430.79,4789 5467.79,4826 5528.2,4826 5583.2,4881 6392.44,4881 6429.44,4918 IC2.1@6429.44,5029.05
  Bottom Layer w10: v1(4531.7,4428) 4531.7,4358 4556.7,4333 v1(4602.7,4333)
UART2_T: IC2.4 U5.55 | length 5410.4
  Top Layer w10: U5.55@2358.52,4697.15 2358.52,4343.17 2643.69,4058 4522.62,4058 4649.2,4184.59 4649.2,4658.5 4721.57,4730.86 5142.51,4730.86 5164.65,4753 5445.7,4753 5482.7,4790 5543.11,4790 5598.11,4845 6459.44,4845 6579.44,4965 IC2.4@6579.44,5029.05
UART3_E: IC3.2 IC3.3 R105.1 U5.67 | length 4729.2
  Top Layer w10: U5.67@2594.74,4697.15 2594.74,4465.61 2609.7,4450.65 2609.7,4346.54 2714.25,4242 4228.7,4242 4280.7,4294 4280.7,4494.58 4495.13,4709 4582.88,4709 4676.74,4802.86 5112.69,4802.86 5134.83,4825 5414.25,4825 5451.25,4862 5513.28,4862 5568.28,4917 6031.94,4917 6070.94,4956 IC3.2@6070.94,5029.05
  Top Layer w20: R105.1@5901.55,5114.02 6059.73,5114.02 ; IC3.2@6070.94,5029.05 6070.94,5102.81 6059.73,5114.02 ; IC3.3@6120.94,5029.05 6120.94,5092.81 6099.73,5114.02 6059.73,5114.02
UART3_R: IC3.1 U5.87 | length 3759.1
  Top Layer w10: U5.87@2819.15,4980.61 3721.32,4980.61 v1(3751.7,5011) ; v1(3734.7,4762) 3748.7,4776 4024.7,4776 4241.7,4559 4319.67,4559 4487.67,4727 4575.42,4727 4669.28,4820.86 5105.24,4820.86 5127.37,4843 5406.79,4843 5443.79,4880 5505.83,4880 5560.83,4935 5971.94,4935 6020.94,4984
  Bottom Layer w10: v1(3734.7,4762) 3751.7,4779 v1(3751.7,5011)
UART3_T: IC3.4 U5.86 | length 4195.2
  Top Layer w10: U5.86@2819.15,4960.92 4017.63,4960.92 4052.7,4996 v1(4054.7,4994) ; v1(4319.7,4433) 4319.7,4508.12 4502.58,4691 4594.79,4691 4688.65,4784.86 5120.15,4784.86 5142.29,4807 5421.7,4807 5458.7,4844 5520.74,4844 5575.74,4899 6119.94,4899 6170.94,4950 IC3.4@6170.94,5029.05
  Bottom Layer w10: v1(4054.7,4994) 4156.7,4994 4213.11,4937.6 4213.11,4763 4247.11,4729 4289.7,4729 4320.7,4698 v1@4320.7,4433
UART4_E: IC4.2 IC4.3 R106.1 U5.80 | length 3390.1
  Top Layer w10: U5.80@2819.15,4842.81 2820.08,4841.88 4045.23,4841.88 4274.11,4613 4297.3,4613 4465.3,4781 4553.05,4781 4646.92,4874.86 5082.87,4874.86 5105.01,4897 5384.43,4897 5421.43,4934 5472.7,4934 5568.7,5030 5568.7,5089.99 ; R106.1@5480.73,5099.39 5568.7,5099.39 ; 5578.03,5099.31 5568.7,5089.99 ; IC4.2@5662.44,5029.05 5662.44,5079 5662.03,5079 5641.64,5099.39 5568.7,5099.39 ; 5568.7,5089.99 5568.7,5099.39
  Top Layer w20: IC4.2@5662.44,5029.05 IC4.3@5712.44,5029.05
UART4_R: IC4.1 U5.79 | length 3097.7
  Top Layer w10: U5.79@2819.98,4822.3 U5.79@2819.15,4823.13 3014.16,4823.13 ; 3013.82,4823.88 4037.77,4823.88 4266.65,4595 4304.76,4595 4472.76,4763 4560.51,4763 4654.37,4856.86 5090.32,4856.86 5112.46,4879 5391.88,4879 5428.88,4916 5489.7,4916 5548.7,4975 5606.7,4975 5612.44,4980.74 IC4.1@5612.44,5029.05
UART4_T: IC4.4 U5.78 | length 3261
  Top Layer w10: U5.78@2820.08,4802.51 U5.78@2819.15,4803.44 4032.75,4803.44 4259.2,4577 4312.21,4577 4480.21,4745 4567.97,4745 4661.83,4838.86 5097.78,4838.86 5119.92,4861 5399.34,4861 5436.34,4898 5498.37,4898 5553.37,4953 5746.72,4953 5762.44,4968.72 IC4.4@5762.44,5029.05
UH_DM3: J13.33 J13.34 | length 78.7
  Top Layer w20: J13.33@3871.99,3872.87 J13.34@3871.99,3951.61
UH_DP3: J13.31 J13.32 | length 78.7
  Top Layer w20: J13.31@3793.25,3872.87 J13.32@3793.25,3951.61
VDD1V8_EXT: J13.53 J13.54 | length 78.7
  Top Layer w20: J13.53@4659.39,3872.87 J13.54@4659.39,3951.61
VDD_TF: J13.37 J13.38 | length 78.7
  Top Layer w20: J13.37@4029.47,3872.87 J13.38@4029.47,3951.61
VSYS: J13.35 J13.36 | length 78.7
  Top Layer w20: J13.35@3950.73,3872.87 J13.36@3950.73,3951.61
XEINT7/GPX0_7: J13.39 J13.40 | length 78.7
  Top Layer w20: J13.39@4108.21,3872.87 J13.40@4108.21,3951.61
XMMC2CLK: J13.47 J13.48 | length 78.7
  Top Layer w20: J13.47@4423.17,3872.87 J13.48@4423.17,3951.61
XMMC2CMD: J13.45 J13.46 | length 78.7
  Top Layer w20: J13.45@4344.43,3872.87 J13.46@4344.43,3951.61
XMMC2DATA0: J13.49 J13.50 | length 78.7
  Top Layer w20: J13.49@4501.91,3872.87 J13.50@4501.91,3951.61
XMMC2DATA1: J13.51 J13.52 | length 78.7
  Top Layer w20: J13.51@4580.65,3872.87 J13.52@4580.65,3951.61
XMMC2DATA2: J13.41 J13.42 | length 78.7
  Top Layer w20: J13.41@4186.95,3872.87 J13.42@4186.95,3951.61
XMMC2DATA3: J13.43 J13.44 | length 78.7
  Top Layer w20: J13.43@4265.69,3872.87 J13.44@4265.69,3951.61
XUOTGDM: J13.11 J13.12 R64.2 | length 5246.8
  Top Layer w10: R64.2@918.07,693 1636.7,693 1730.7,787 1730.7,3453 1809.7,3532 v1@2987.7,3532 ; v1@2993.7,3526 2997.7,3522 v1(2997.7,3530)
  Bottom Layer w10: v1(2997.7,3530) 2998.7,3531 2998.7,3830.46 2997.7,3831.46 2997.7,3864.73 J13.11@3005.85,3872.87 J13.12@3005.85,3951.61
XUOTGDP: J13.13 J13.14 R63.2 | length 5396
  Top Layer w10: R63.2@918.07,590 1608.7,590 1748.7,730 1748.7,3443.46 1819.25,3514 2974.11,3514 2986.11,3502 3030.7,3502 v1(3031.7,3503)
  Bottom Layer w10: v1(3031.7,3503) 3025.7,3509 3025.7,3541.6 3024.7,3542.6 3024.7,3812.99 J13.13@3084.59,3872.87 J13.14@3084.59,3951.61
XUOTGID: J13.15 J13.16 R62.2 | length 5581.2
  Top Layer w10: R62.2@918.07,487 1578.7,487 1766.7,675 1766.7,3436 1825.7,3495 2967.65,3495 2987.65,3475 3063.7,3475 v1(3071.7,3483)
  Bottom Layer w10: v1(3071.7,3483) 3071.7,3513 3043.7,3541 3043.7,3549.05 3042.7,3550.05 3042.7,3790 3088.95,3836.25 3099.76,3836.25 3136.38,3872.87 J13.15@3163.33,3872.87 J13.16@3163.33,3951.61
XUOTGVBUS: J13.9 J13.10 R68.2 | length 5133.4
  Top Layer w10: R68.2@918.07,796 1648.7,796 1712.7,860 1712.7,3460.46 1802.25,3550 2947.7,3550 v1(2957.7,3560)
  Bottom Layer w10: J13.10@2927.11,3951.61 J13.9@2927.11,3872.87 2930.83,3872.87 2980.7,3823 2980.7,3583 v1(2957.7,3560)
pads on no net: IC1.11 IC1.12 IC1.13 IC1.14 J1.0 J3.0 J4.0 J5.0 J6.7 J7.0 J8.0 J8.4 J9.0 J10.0 J11.0 J12.0 J13.25 J13.26 J13.55 J13.56 J13.57 J13.58 J13.59 J13.60 J14.1 J14.2 J14.3 J14.4 J14.5 J14.6 J14.16 J14.18 J14.19 J14.20 J14.21 J14.22 J14.24 J14.26 J14.28 J14.30 J14.31 J14.32 J14.34 J14.36 J14.38 J14.40 J15.0 J16.0 J17.7 J18.29 J18.30 J18.31 J18.32 J19.0 U4.1 U4.5 U4.7 U4.8 U5.6 U5.7 U5.8 U5.9 U5.13 U5.18 U5.70 U5.71 U5.73 U6.4 U6.5 U6.12 U6.13 Y1.1

## Keep-outs
Keep-Out Layer:
  lines w5: 7836.7,2326 7332.7,2326 7332.7,957 7874.02,957 7874.02,291.3 7874.02,0 7101.31,0 7101.31,291.3 772.7,291.3 772.7,0 0,0 0,291.3 0,1640 1.7,1640 140.7,1640 140.7,2487 0,2487 0,2585 0,5853 -144.3,5853 -144.3,6196.81 0,6196.81 7048.7,6196.81 7048.7,6026 7344.7,6026 7344.7,6196.81 7382.7,6196.81 8018.31,6196.81 8018.31,5853 7874.02,5853 7836.7,5853 7836.7,2327

## Other copper
Top Layer:
  rectangle net 12V_OUT: 4111,488 4249,818

## Dimensions
0,0 to 0,6196.81 on Keep-Out Layer
0,0 to 7874.02,0 on Keep-Out Layer

## Text inside footprints (layer, text, board x,y; h text height)
Q3: Mechanical 9 "3" at 5650.25,1189.8 h25 r90; Mechanical 9 "1" at 5557.75,1227.8 h25 r90; Mechanical 9 "2" at 5557.75,1152.8 h25 r90
Q5: Mechanical 9 "3" at 5655.25,1529.8 h25 r90; Mechanical 9 "1" at 5562.75,1567.8 h25 r90; Mechanical 9 "2" at 5562.75,1492.8 h25 r90
U1: Top Overlay "5" at 6213.44,1962.96 h50 r270; Top Overlay "1" at 6213.44,2342.96 h50 r270
U3: Top Overlay "5" at 6213.44,3136.49 h50 r270; Top Overlay "1" at 6213.44,3516.49 h50 r270